# Altium PCB PCB_DTACK Card 16 DIP_2023-08-05_Altium.pcbdoc
Units mil, origin at the board's own origin, x right, y up, seen from the top; angles counter-clockwise.
Board outline 6095 x 4580 mil, 2 copper layers (Top Layer, Bottom Layer); 5 components, 60 nets, 84 pads, 2 vias.
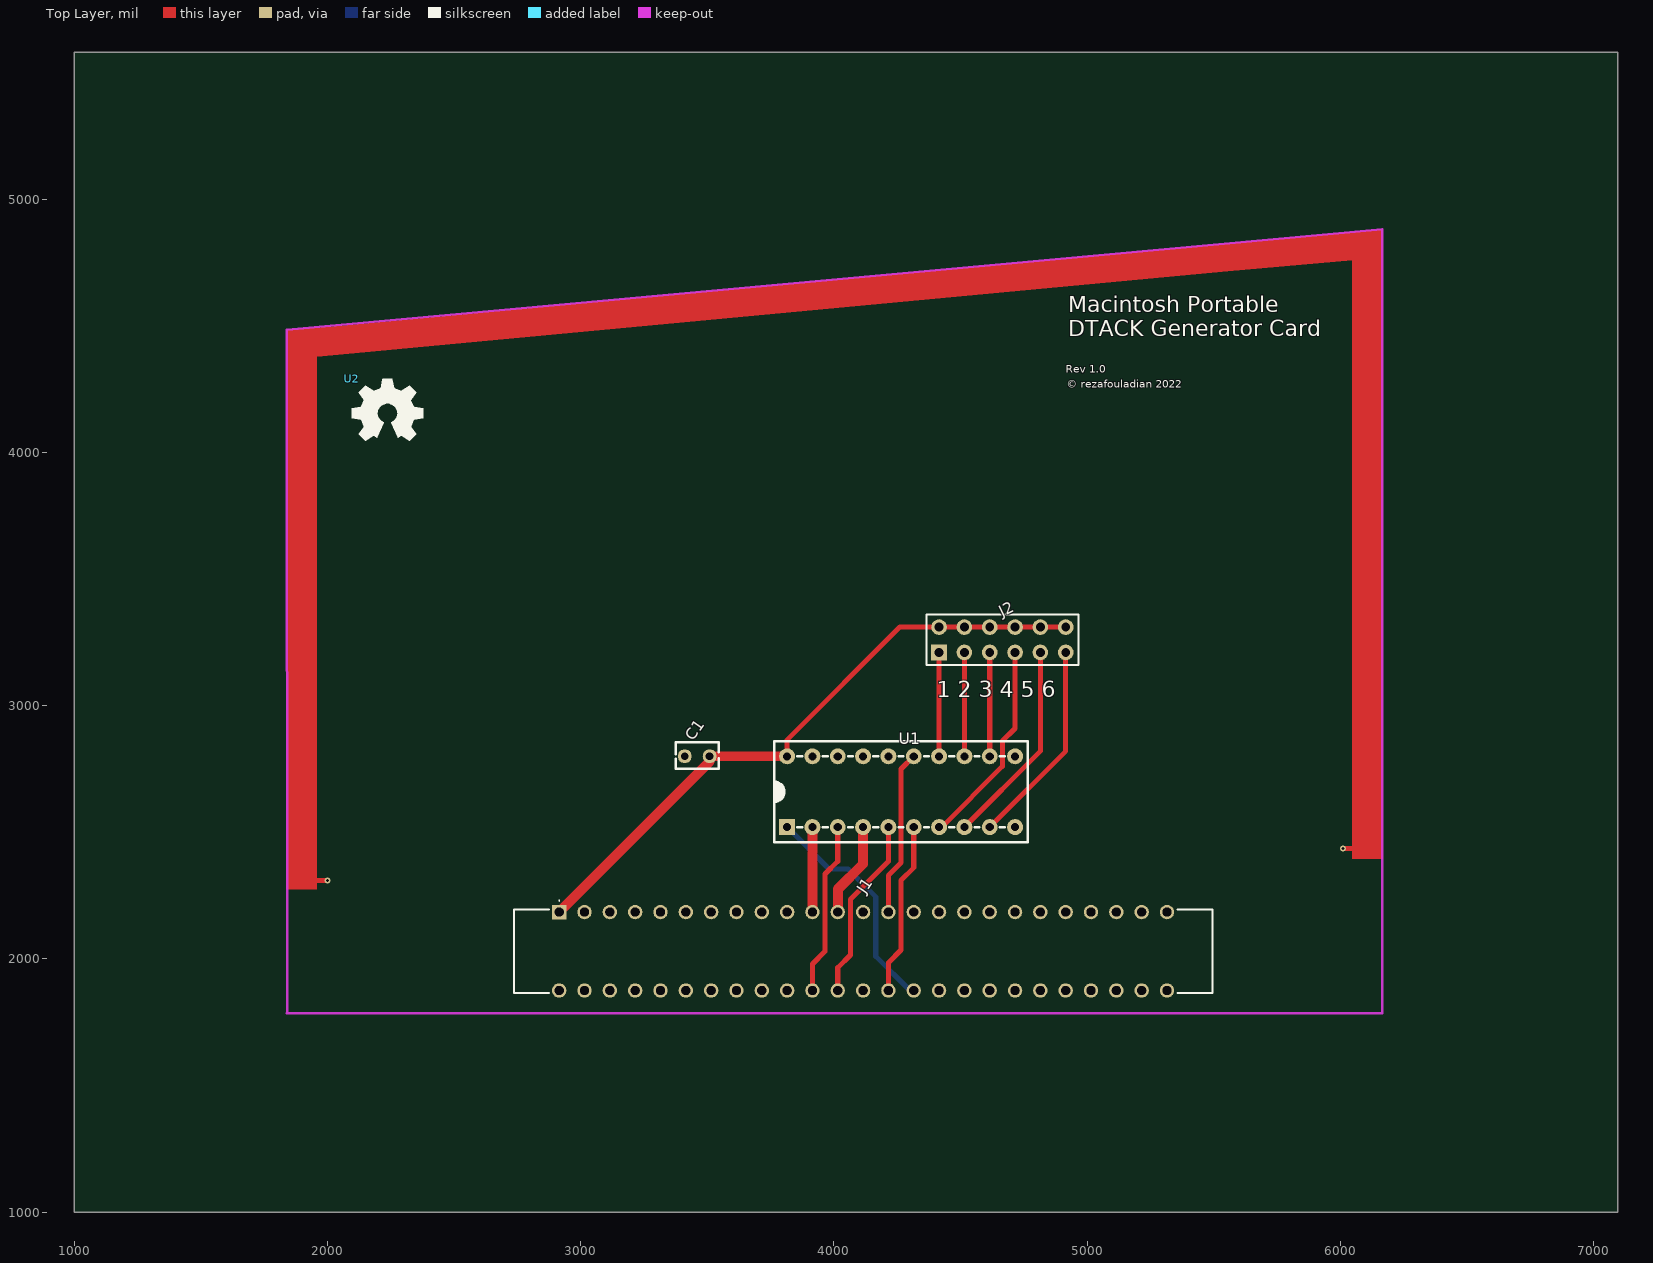
[diagram p0: Top Layer view]
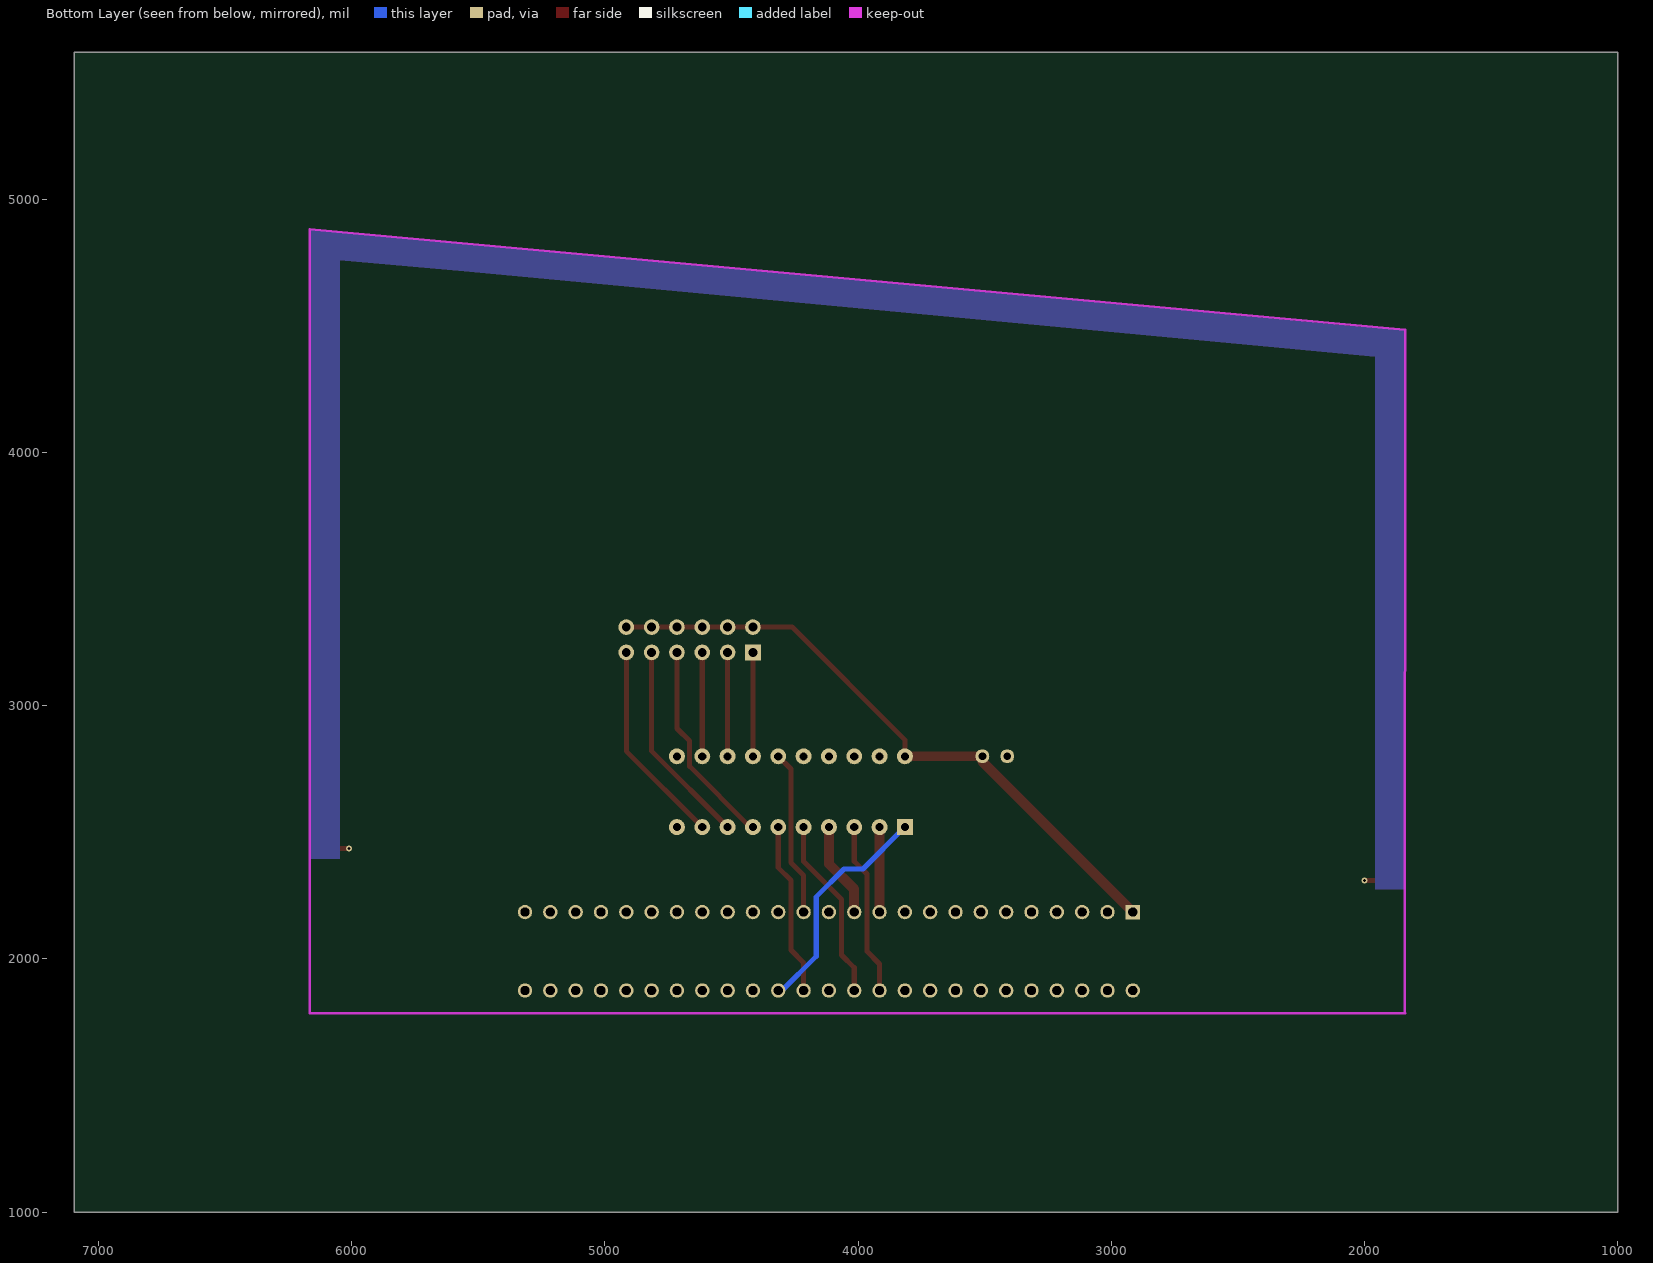
[diagram p1: Bottom Layer view, seen from below]

## Layer stack, top to bottom
Top Layer: signal copper (thickness not stored)
Dielectric: dielectric 12.6, FR-4, Dk 4.8
Bottom Layer: signal copper (thickness not stored)

## Board outline
7095,1000 1000,1000 1000,5580 7095,5580

## Components (designator, comment, footprint, x,y, rotation, side; value= is the part's Value field where it differs from the comment)
C1 "220nF" CAP-TH_L4.0-W2.5-P2.50-D0.5 3460,2800 r180 top
J1 "66527-025LF" 66527025LF 2915,1875 r0 top
J2 "HDR-M-2.54_2x6" HDR-M-2.54_2X6 4665,3260 r0 top
U1 "ATF16V8C-7PU" DIP-20_L25.4-W7.1-P2.54-LS8.5-BL 4265,2660 r0 top
U2 "OSHWA LOGO" "OSHWA LOGO" 2095,4290 r0 top

## Footprints (in the part's own frame and the unit in brackets; to place one, negate y for a bottom-side part, rotate by r counter-clockwise, add the part's x,y. Pads: shape width x height; smd on the part's side, far side on the other; paste and mask are expansions set on the pad)
66527025LF [mm]
  rect 1.446x1.446 hole 0.89 slot 0.895 at 0 deg paste+0 mask+0.051: 1(0,7.87)
  round 1.446 hole 0.89 slot 0.895 at 0 deg paste+0 mask+0.051: 2(0,0) 3(2.54,7.87) 4(2.54,0) 5(5.08,7.87) 6(5.08,0) 7(7.62,7.87) 8(7.62,0) 9(10.16,7.87) 10(10.16,0) 11(12.7,7.87) 12(12.7,0) 13(15.24,7.87) 14(15.24,0) 15(17.78,7.87) 16(17.78,0) 17(20.32,7.87) 18(20.32,0) 19(22.86,7.87) 20(22.86,0) 21(25.4,7.87) 22(25.4,0) 23(27.94,7.87) 24(27.94,0) 25(30.48,7.87) 26(30.48,0) 27(33.02,7.87) 28(33.02,0) 29(35.56,7.87) 30(35.56,0) 31(38.1,7.87) 32(38.1,0) 33(40.64,7.87) 34(40.64,0) 35(43.18,7.87) 36(43.18,0) 37(45.72,7.87) 38(45.72,0) 39(48.26,7.87) 40(48.26,0) 41(50.8,7.87) 42(50.8,0) 43(53.34,7.87) 44(53.34,0) 45(55.88,7.87) 46(55.88,0) 47(58.42,7.87) 48(58.42,0) 49(60.96,7.87) 50(60.96,0)
  silkscreen extent -4.55,-0.26 65.5,9.07
CAP-TH_L4.0-W2.5-P2.50-D0.5 [mm]
  round 1.4 hole 0.8 paste+0 mask+0.05: 1(-1.25,0) 2(1.25,0)
  silkscreen extent -2.16,-1.4 2.16,1.27
DIP-20_L25.4-W7.1-P2.54-LS8.5-BL [mil]
  rect 63x63 hole 32 paste+0 mask+2: 1(-450,-139.76)
  round 63 hole 32 paste+0 mask+2: 2(-350,-139.76) 3(-250,-139.76) 4(-150,-139.76) 5(-50,-139.76) 6(50,-139.76) 7(150,-139.76) 8(250,-139.76) 9(350,-139.76) 10(450,-139.76) 11(450,139.76) 12(350,139.76) 13(250,139.76) 14(150,139.76) 15(50,139.76) 16(-50,139.76) 17(-150,139.76) 18(-250,139.76) 19(-350,139.76) 20(-450,139.76)
  silkscreen extent -500,-200 500,200
HDR-M-2.54_2X6 [mil]
  rect 62x62 hole 35 paste+0 mask+2: 1(-250,-50)
  round 62 hole 35 paste+0 mask+2: 2(-250,50) 3(-150,-50) 4(-150,50) 5(-50,-50) 6(-50,50) 7(50,-50) 8(50,50) 9(150,-50) 10(150,50) 11(250,-50) 12(250,50)
  silkscreen extent -300,-100 300,100
"OSHWA LOGO" [mil]
  silkscreen extent 0,-244 284,0

## Via types
v1: diameter 24, hole 12, Top Layer to Bottom Layer, tented both sides, 2 vias

## Nets (pads, with @x,y where several pads share a name; then routed paths per layer and width w, separated by ;. In a path a pad name is that pad's centre, name@x,y a point inside that pad or via, vN(x,y) a via of type N, cw(c..) or ccw(c..) an arc to the next point about the centre after c; other vN are vias at no path point)
16MHZ_CLOCK_F: J1.30 U1.1 | length 904.9
  Bottom Layer w20: U1.1 3980.24,2355 4055,2355 4165,2245 4165,2010 4299.99,1875.01 J1.30
ADDR(17): J1.18
ADDR(18): J1.19
ADDR(19): J1.20
ADDR(20): J1.21 U1.2 | length 335.4
  Top Layer w39.37: J1.21 U1.2
ADDR(21): J1.22 U1.3 | length 686.7
  Top Layer w20: J1.22 3915,1980 3965,2030 3965,2335 4015,2385 U1.3
ADDR(22): J1.23 U1.4 | length 376.8
  Top Layer w39.37: J1.23 4015,2275 4115,2375 U1.4
ADDR(23): J1.24 U1.5 | length 728.1
  Top Layer w20: J1.24 4015,1965 4065,2015 4065,2235 4215,2385 U1.5
ADDRUB(1): J1.2
ADDRUB(2): J1.3
ADDRUB(3): J1.4
ADDRUB(4): J1.5
ADDRUB(5): J1.6
ADDRUB(6): J1.7
ADDRUB(7): J1.8
ADDRUB(8): J1.9
ADDRUB(9): J1.10
ADDRUB(10): J1.11
ADDRUB(11): J1.12
ADDRUB(12): J1.13
ADDRUB(13): J1.14
ADDRUB(14): J1.15
ADDRUB(15): J1.16
ADDRUB(16): J1.17
AS*: J1.28 U1.6 | length 686.7
  Top Layer w20: J1.28 4215,1985 4265,2035 4265,2310 4315,2360 U1.6
DATA(0): J1.33
DATA(1): J1.34
DATA(2): J1.35
DATA(3): J1.36
DATA(4): J1.37
DATA(5): J1.38
DATA(6): J1.39
DATA(7): J1.40
DATA(8): J1.41
DATA(9): J1.42
DATA(10): J1.43
DATA(11): J1.44
DATA(12): J1.45
DATA(13): J1.46
DATA(14): J1.47
DATA(15): J1.48
DELAY1: U1.18
DELAY2: U1.17
DELAY3: U1.16
DELAY_CS*: J1.32
DTACK*: J1.27 U1.15 | length 656.3
  Top Layer w20: J1.27 4215,2330 4265,2380 4265,2749.76 U1.15
DTACK_SEL: U1.19
EXT_DTACK*: J1.31
GND: C1.2 J1.25 J1.26 U1.10 U1.11 | length 130
  Top Layer w20: 1925,2310 v1(2000,2310) ; v1(6010,2435) 6065,2435
J1: J2.1 U1.14 | length 410.2
  Top Layer w20: U1.14 J2.1
J2: J2.3 U1.13 | length 410.2
  Top Layer w20: U1.13 J2.3
J3: J2.5 U1.12 | length 410.2
  Top Layer w20: U1.12 J2.5
J4: J2.7 U1.7 | length 820
  Top Layer w20: U1.7 4425.2,2520.2 4665,2760 4665,2860 4715,2910 J2.7
J5: J2.9 U1.8 | length 814
  Top Layer w20: U1.8 4815,2820.24 J2.9
J6: J2.11 U1.9 | length 814
  Top Layer w20: U1.9 4915,2820.24 J2.11
ROM_CS*: J1.29
S$811: 
S$819: 
S$21666: 
VCC: C1.1 J1.1 J1.49 J1.50 J2.2 J2.4 J2.6 J2.8 J2.10 J2.12 U1.20 | length 2516.7
  Top Layer w20: U1.20 3815,2865 4260,3310 J2.2 J2.4 J2.6 J2.8 J2.10 J2.12
  Top Layer w39.37: J1.1 3509.21,2779.06 C1.1 3814.76,2800 U1.20

## Polygon pours and split planes (outlines as drawn)
GND on Bottom Layer (solid): 6595,5080 6570,5055 6570,1540 6530,1500 1530,1500 1500,1530 1500,4825

## Other copper
Top Layer:
  region net GND: 1958.42,2275.08 1958.35,2275 1840,2275 1840,4485 2055,4500 2535,4545 6165,4880 6165,2395 6164.76,2394.76 6046.61,2394.76 6046.61,4759.48 5555,4715 1958.42,4377.75 1958.42,2275.08

## Silkscreen, mask and mechanical layers (free items; w line width, h text height)
Top Overlay:
  text "Macintosh Portable / DTACK Generator Card" at 4925,4458.5 h62.99
  text "Rev 1.0" at 4915,4305 h51.18
  text "© rezafouladian 2022" at 4920,4245 h51.18
  text "1 2 3 4 5 6" at 4405,3033.5 h62.99
Top Solder:
  region net VCC: 1958.42,2275.08 1958.35,2275 1840,2275 1840,4485 2055,4500 2535,4545 6165,4880 6165,2395 6164.76,2394.76 6046.61,2394.76 6046.61,4759.48 5555,4715 1958.42,4377.75 1958.42,2275.08
Bottom Solder:
  region net VCC: 1958.42,2275.08 1958.35,2275 1840,2275 1840,4485 2055,4500 2535,4545 6165,4880 6165,2395 6164.76,2394.76 6046.61,2394.76 6046.61,4759.48 5555,4715 1958.42,4377.75 1958.42,2275.08